# Altium PCB optic_fiber_tx.PcbDoc
Units mil, origin at the board's own origin, x right, y up, seen from the top; angles counter-clockwise.
Board outline 825 x 1710 mil, 2 copper layers (Top Layer, Bottom Layer); 8 components, 4 nets, 29 pads, 0 vias.
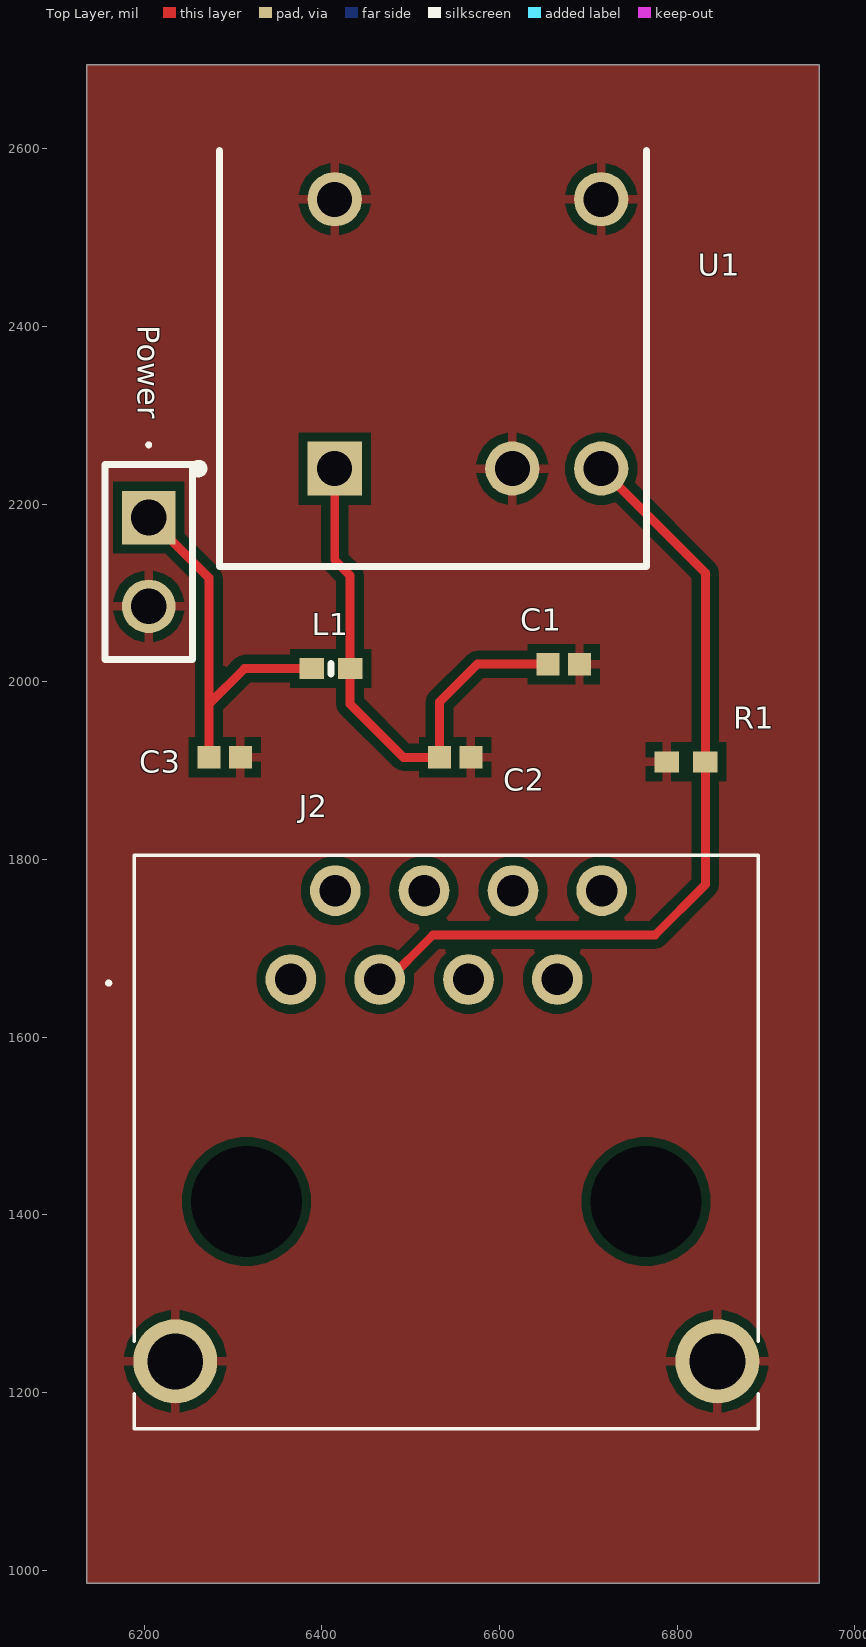
[diagram p0: Top Layer view]
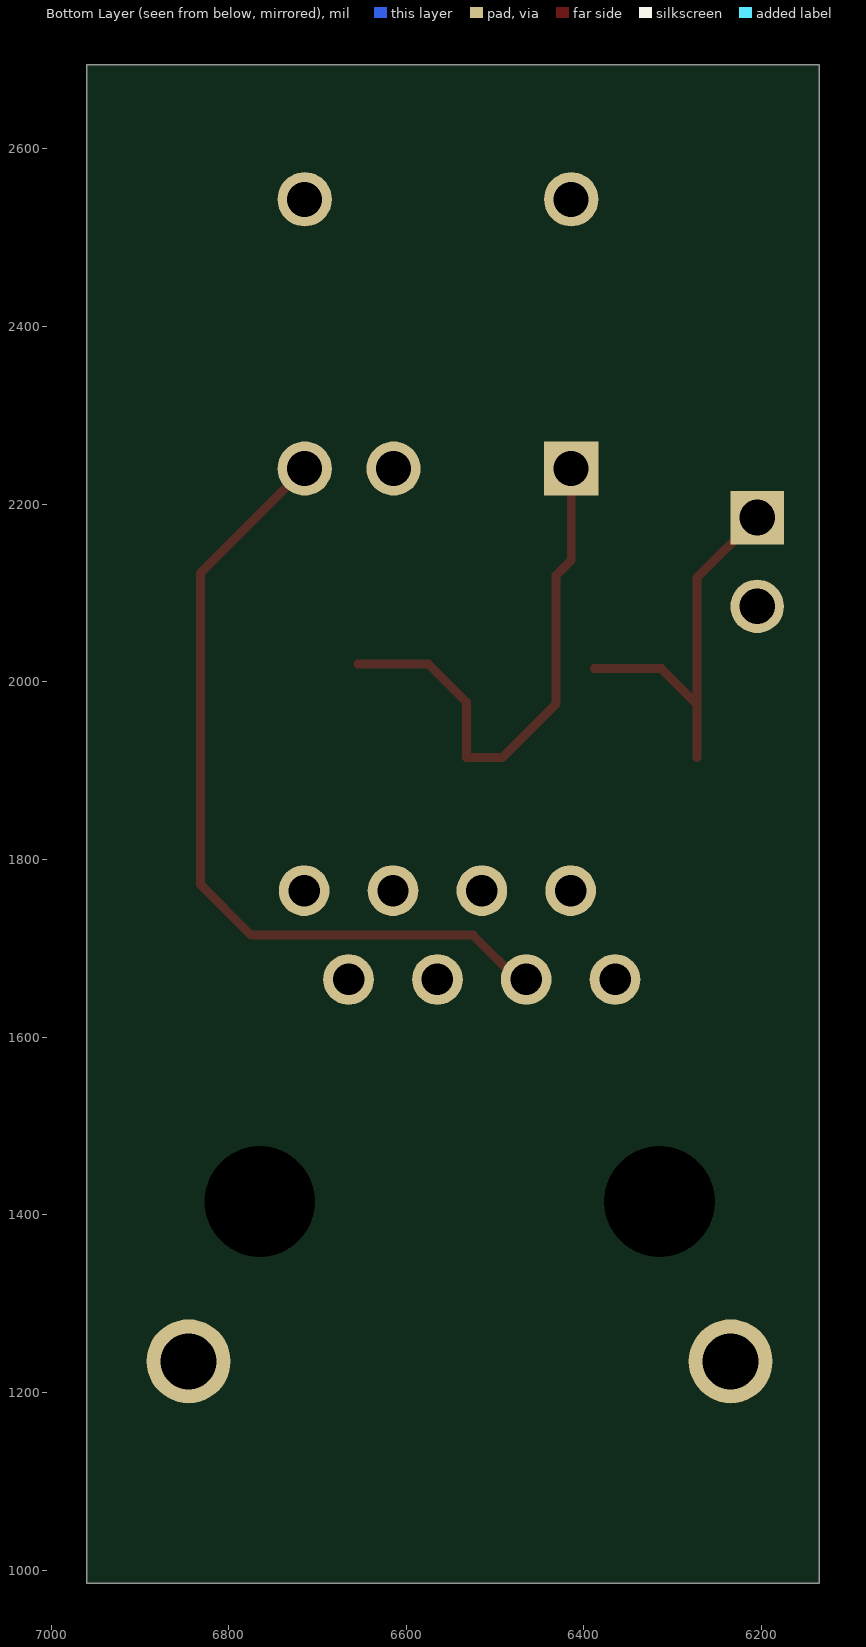
[diagram p1: Bottom Layer view, seen from below]
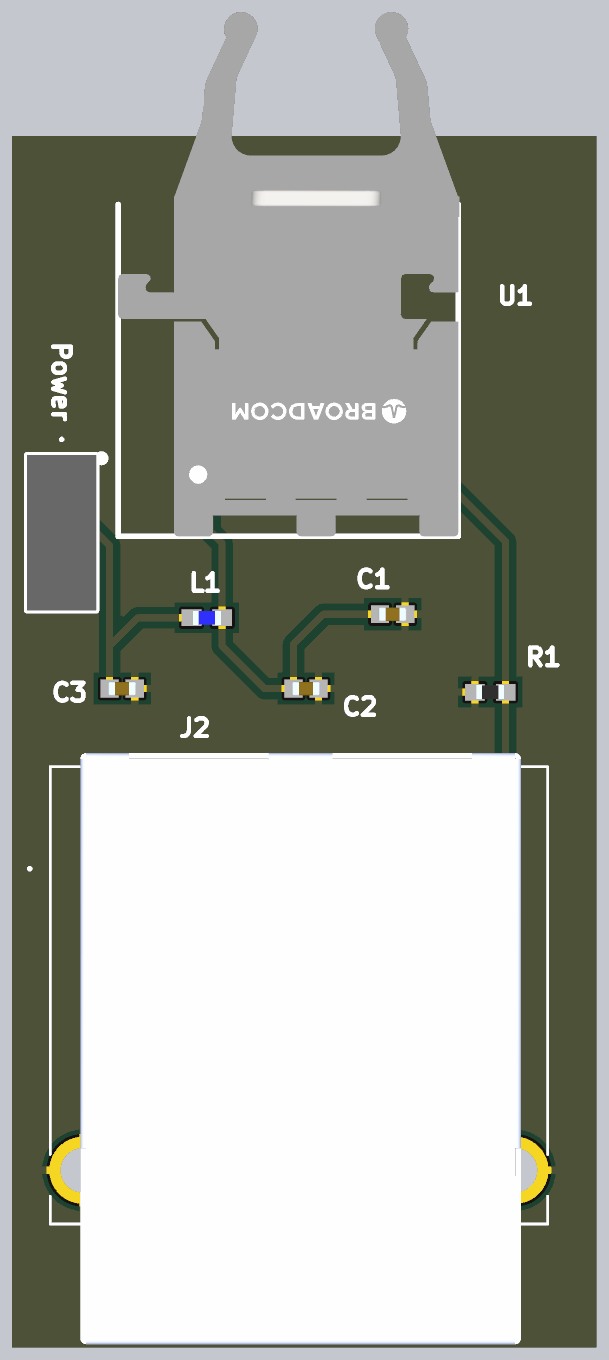
[diagram p2: 3D render of the assembled board from above, using the file's embedded part models]

## Layer stack, top to bottom
Top Solder: solder mask 0.4, Solder Resist, Dk 3.5
Top Layer: signal copper 1.4
Dielectric 1: dielectric 12.6, FR-4, Dk 4.8
Bottom Layer: signal copper 1.4
Bottom Solder: solder mask 0.4, Solder Resist, Dk 3.5

## Board outline
6960,2695 6960,985 6135,985 6135,2695

## Design rules (kind name [scope] priority, off if disabled: settings)
Clearance [All] p1: gap=10 ignorepadtopadclearanceinfootprint=FALSE
PolygonConnect [All] p1: connectstyle=Relief reliefconductorwidth=10 reliefentries=4 polygonreliefangle="90 Angle" airgapwidth=10
RoutingVias [All] p1: holewidth=28 width=50 viastyle="Through Hole" minholewidth=28 minwidth=50 maxholewidth=28 maxwidth=50
SolderMaskExpansion [All] p1: expansion=4 istentingtop=FALSE
Width [All] p1: maxlimit=10 minlimit=10 preferedwidth=10
30 further rules are at their usual default settings.

## Classes and differential pairs
component class optic_fiber_tx: C2 C3 J2 L1 Power R1 U1

## Components (designator, comment, footprint, x,y, rotation, side; value= is the part's Value field where it differs from the comment)
C1 "04026D104KAT2A" CAPC1005X56N 6672.28,2020 r180 top
C2 "04026D106MAT2A" CAPC1005X56N 6550,1915 r180 top
C3 "04026D106MAT2A" CAPC1005X56N 6290.51,1915 r180 top
J2 "61500814221" 61500814221 6365,1665 r0 top
L1 "ATFC-0402-1N0-BT" INDC1005X37N 6410,2015 r180 top
Power "61300211821" 61300211821 6205,2185 r270 top (schematic designator J1)
R1 "CRCW04024K70JNEDHP" RESC1005X40N 6810,1910 r180 top
U1 "AFBR-1624Z" FP-AFBR-1624Z-MFG 6525,2500 r180 top

## Footprints (in the part's own frame and the unit in brackets; to place one, negate y for a bottom-side part, rotate by r counter-clockwise, add the part's x,y. Pads: shape width x height; smd on the part's side, far side on the other; paste and mask are expansions set on the pad)
61300211821 [mm]
  rect 1.53x1.53 hole 1.02: 1(0,0)
  round 1.53 hole 1.02: 2(2.54,0)
  silkscreen extent -2.13,-1.25 4.06,1.25, body extent -1.52,-1.25 4.06,1.25, height 8.75
61500814221 [mm]
  round 1.45 hole 0.9: 1(0,0) 2(1.27,2.54) 3(2.54,0) 4(3.81,2.54) 5(5.08,0) 6(6.35,2.54) 7(7.62,0) 8(8.89,2.54)
  round 2.4 hole 1.6: MH1(-3.305,-10.92) MH2(12.195,-10.92)
  round 1.585 hole 3.17 unplated: MH3(-1.27,-6.35) MH4(10.16,-6.35)
  silkscreen extent -5.26,-12.85 13.37,3.55, body extent -3.39,-17.16 12.41,4.04, height 13.6
CAPC1005X56N [mm]
  rect 0.65x0.64 smd: 1(-0.45,0) 2(0.45,0)
  body extent -0.5,-0.25 0.5,0.25, height 0.56
FP-AFBR-1624Z-MFG [mm]
  rect 1.55x1.55 hole 1 paste-2539.97 mask+0: 1(2.81,6.6)
  round 1.55 hole 1 paste-2539.97 mask+0: 3(-2.27,6.6) 4(-4.81,6.6) 5(-4.81,-1.1) 8(2.81,-1.1)
  silkscreen extent -6.1,-2.5 6.82,9.4, body extent -6.2,-9.5 6.2,9.5, height 0.25
INDC1005X37N [mm]
  rect 0.7x0.6 smd: 1(-0.55,0) 2(0.55,0)
  silkscreen extent 0,-0.15 0,0.15, body extent -0.5,-0.25 0.5,0.25, height 0.37
RESC1005X40N [mm]
  rect 0.7x0.6 smd: 1(-0.55,0) 2(0.55,0)
  body extent -0.5,-0.25 0.5,0.25, height 0.4

## Part data
C1: "Capacitor", Manufacturer_Name="Kyocera AVX", Mouser Part Number=581-04026D104KAT2A, Arrow Part Number=04026D104KAT2A, Arrow Price/Stock=https://www.arrow.com/en/products/04026d104kat2a/avx?region=nac, Datasheet Link=http://www.mouser.com/catalog/supplier/library/pdf/AVXSurfaceMountCeramic.pdf, Height=0.56mm, Manufacturer_Part_Number=04026D104KAT2A, Mouser Price/Stock=https://www.mouser.co.uk/ProductDetail/AVX/04026D104KAT2A?qs=LLG2yGGJ5NhILwMziGI8Xg%3D%3D
C2 C3: "Capacitor", Manufacturer_Name="Kyocera AVX", Mouser Part Number=581-04026D106MAT2A, Arrow Part Number=04026D106MAT2A, Arrow Price/Stock=https://www.arrow.com/en/products/04026d106mat2a/avx, Datasheet Link=http://www.mouser.com/catalog/supplier/library/pdf/AVXSurfaceMountCeramic.pdf, Height=0.56mm, Manufacturer_Part_Number=04026D106MAT2A, Mouser Price/Stock=https://www.mouser.co.uk/ProductDetail/AVX/04026D106MAT2A?qs=XLNwXgtzMM9wXpSOj34Byg%3D%3D
J2: "Connector", Manufacturer_Name="Wurth Elektronik", Mouser Part Number=710-61500814221, Datasheet Link=http://katalog.we-online.de/em/datasheet/61500814221.pdf, Height=16.53mm, Manufacturer_Part_Number=61500814221, Mouser Price/Stock=https://www.mouser.co.uk/ProductDetail/Wurth-Elektronik/61500814221?qs=rS3zZhy2AQOW6FITBQg0lg%3D%3D
L1: "Inductor", Manufacturer_Name=ABRACON, Mouser Part Number=815-ATFC-0402-1N0-BT, Datasheet Link=http://www.mouser.com/ds/2/3/ATFC-0402-6001.pdf, Height=0.37mm, Manufacturer_Part_Number=ATFC-0402-1N0-BT
Power: "Connector", Manufacturer_Name="Wurth Elektronik", Datasheet Link=https://www.we-online.com/catalog/datasheet/61300211821.pdf, Height=8.65mm, Manufacturer_Part_Number=61300211821
R1: "Resistor", Manufacturer_Name=Vishay, Mouser Part Number=71-CRCW04024K70JNEDH, Arrow Part Number=CRCW04024K70JNEDHP, Arrow Price/Stock=https://www.arrow.com/en/products/crcw04024k70jnedhp/vishay?region=nac, Datasheet Link=http://www.vishay.com/docs/20035/dcrcwe3.pdf, Height=0.4mm, Manufacturer_Part_Number=CRCW04024K70JNEDHP, Mouser Price/Stock=https://www.mouser.co.uk/ProductDetail/Vishay-Dale/CRCW04024K70JNEDHP?qs=k2%2FDWSARqgGhgirK%2FulFyA%3D%3D
U1: library part CMP-18396-000003-1, "TXRX OPT 650NM 1MM POF", Forward Current=21mA, Forward Voltage=3.3V, Max Operating Temperature=85°C, Min Operating Temperature=-40°C, Package Quantity=200, Fall Time=5ns, Height=7.62mm, Length=18.8mm, Mount="Through Hole", Number of Pins=6, Operating Supply Current=21mA, Operating Supply Voltage=3.3V, REACH SVHC="No SVHC", Rise Time=5ns, Series="Versatile Link", Wavelength=650nm, Width=12.19mm

## Nets (pads, with @x,y where several pads share a name; then routed paths per layer and width w, separated by ;. In a path a pad name is that pad's centre, name@x,y a point inside that pad or via, vN(x,y) a via of type N, cw(c..) or ccw(c..) an arc to the next point about the centre after c; other vN are vias at no path point)
+5: C3.2 L1.2 Power.1 | length 430.2
  Top Layer w10: Power.1 6272.8,2117.2 6272.8,1975 ; C3.2 6272.8,1975 ; L1.2 6312.8,2015 6272.8,1975
data_input: J2.3 R1.1 U1.4 | length 925
  Top Layer w10: J2.3@6470,1660 6525,1715 6775,1715 6831.65,1771.65 R1.1 6831.65,2122.87 U1.4
GND: C1.1 C2.1 C3.1 J2.MH1 J2.MH2 Power.2 R1.2 U1.3 U1.5 U1.8
NetC1_2: C1.2 C2.2 L1.1 U1.1 | length 600.1
  Top Layer w10: U1.1 6414.37,2137 6431.65,2119.72 L1.1 6431.65,1975 6491.65,1915 C2.2 6532.28,1977.28 6575,2020 C1.2
pads on no net: J2.1 J2.2 J2.4 J2.5 J2.6 J2.7 J2.8 J2.MH3 J2.MH4

## Polygon pours and split planes (outlines as drawn)
GND on Top Layer "GND" (solid, pour order 0): 6960,2695 6135,2695 6135,985 6960,985